# EAGLE board CommDownlinkv1_18_2_12 (EAGLE 5.10)
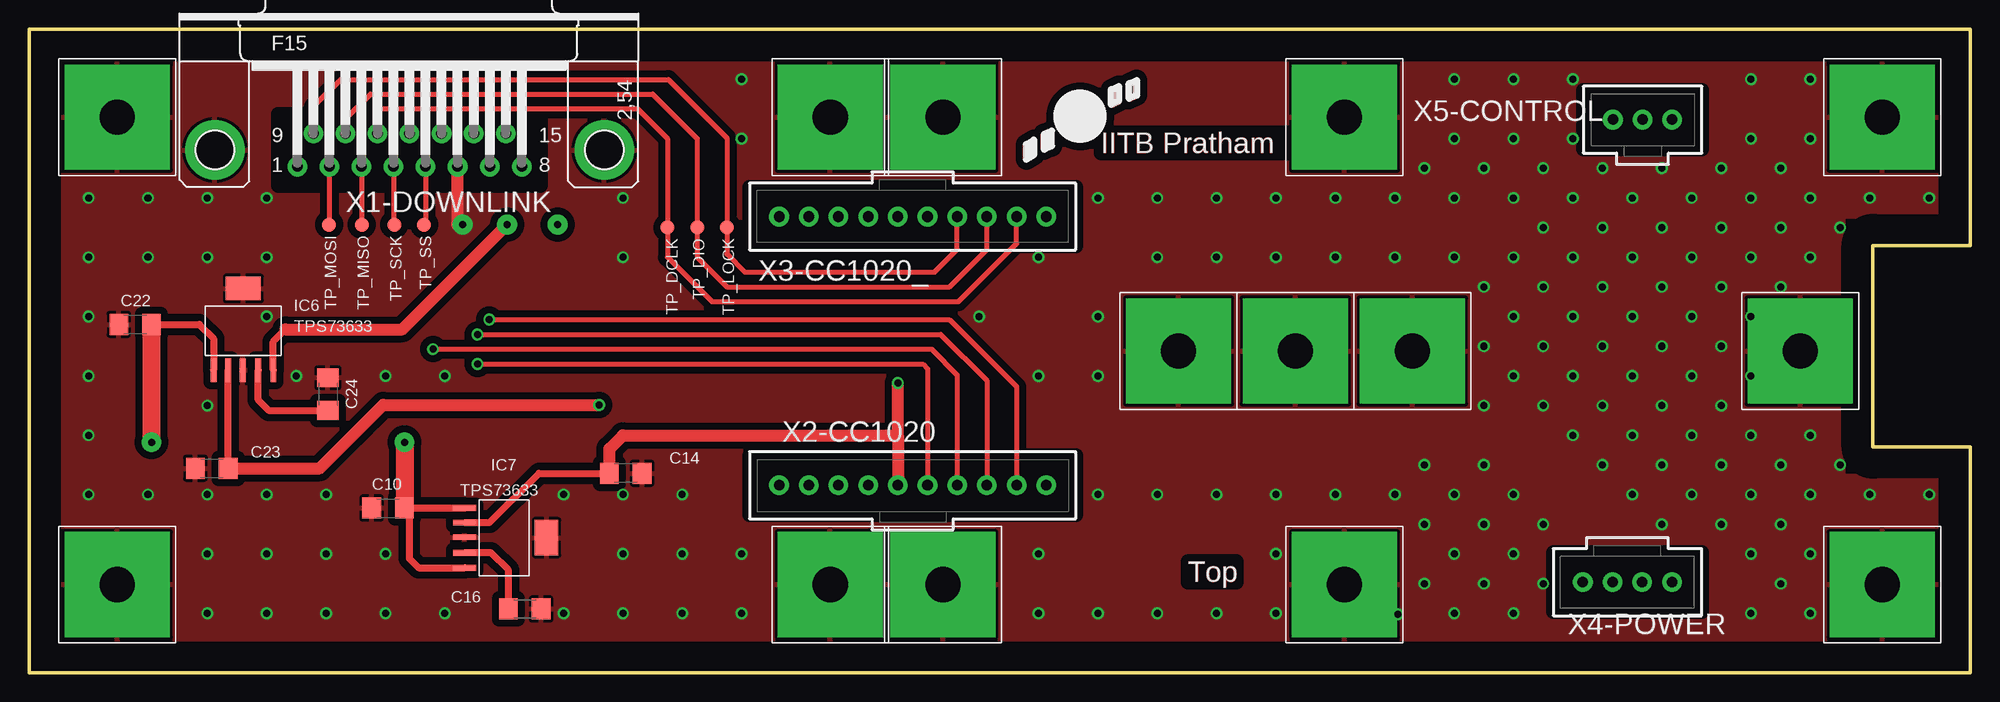
[diagram p0: board, top side]
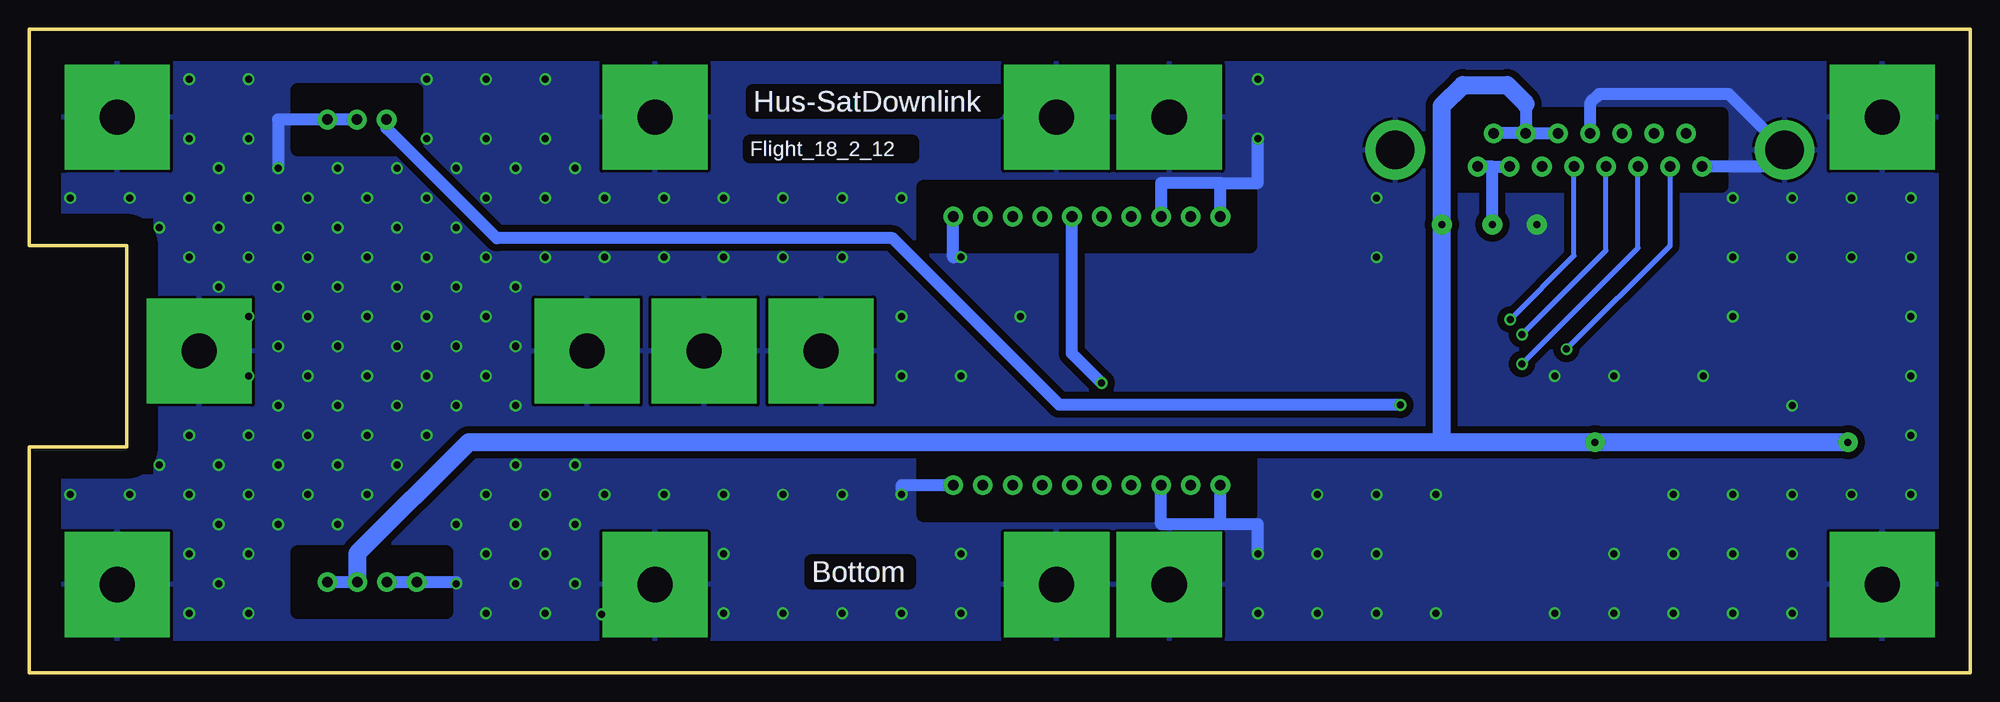
[diagram p1: board, bottom side, seen from below]

Size 166.08 x 55.08 mm. Coordinates in mm from the lower left corner, seen from the top.
Outline: 0,0 166.08,0 166.08,19.32 157.75,19.32 157.75,36.56 166.08,36.56 166.08,55.08 0,55.08 0,0
Copper layers (1*16): Top 0.07mm / dielectric 1.5mm / Bottom 0.07mm
Design rules "satellite": minimum track width 10mil, minimum drill 20mil, track to track 6mil, track to pad 6mil, pad to pad 6mil, via to via 6mil, smd to smd 6mil, copper to edge 100mil, drill to drill 8mil, minimum pad ring 10mil, minimum via ring 8mil, stop-mask expansion 4mil, vias tented up to drill 0mil, thermal gap 10mil
tKeepout: area 54.3,12.5 to 94.7,42.5

## Footprints (pad centres in the part's own frame; a part is rotated, then mirrored left to right if it is on the bottom)
C1206 = smd 1.6 x 1.8: 1 -1.4,0; 2 1.4,0
SOT-223-5 = smd 0.5 x 2: 1 -2.54,-2.75; 2 -1.29,-2.75; 3 -0.04,-2.75; 4 1.29,-2.75; 5 2.58,-2.75 | smd 3 x 2: 6 0,4.25
TP12R = smd 1.2 x 1.2: TP 0,0
MOUNT_10MM = drill 3 pad 9 square: P$1 0,0
F15HP = drill 0.9 pad 1.676 round: 1 -9.601,-1.422; 2 -6.858,-1.422; 3 -4.115,-1.422; 4 -1.372,-1.422; 5 1.372,-1.422; 6 4.115,-1.422; 7 6.858,-1.422; 8 9.601,-1.422; 9 -8.23,1.422; 10 -5.486,1.422; 11 -2.743,1.422; 12 0,1.422; 13 2.743,1.422; 14 5.486,1.422; 15 8.23,1.422 | drill 3.302 pad 5.08 round: G1 16.662,0; G2 -16.662,0
70543-10 = drill 0.9 pad 1.676 round: 1 -11.43,0; 2 -8.89,0; 3 -6.35,0; 4 -3.81,0; 5 -1.27,0; 6 1.27,0; 7 3.81,0; 8 6.35,0; 9 8.89,0; 10 11.43,0
70543-4 = drill 0.9 pad 1.676 round: 1 -3.81,0; 2 -1.27,0; 3 1.27,0; 4 3.81,0
70543-3 = drill 0.9 pad 1.676 round: 1 -2.54,0; 2 0,0; 3 2.54,0

## Placement (x,y rotation side)
C10  0.1uF  [C1206]  30.7,14.1 0 top
C14  2.2uF  [C1206]  51.04,17.07 180 top
C16  0.1uF  [C1206]  42.4,5.46 0 top
C22  0.1uF  [C1206]  9.07,29.81 0 top
C23  0.1uF  [C1206]  15.62,17.49 0 top
C24  0.1uF  [C1206]  25.56,23.85 270 top
IC6  TPS73633  [SOT-223-5]  18.31,28.64 0 top
IC7  TPS73633  [SOT-223-5]  40.01,11.56 270 top
TP_DCLK  TPSQTP12R  [TP12R]  54.61,38.1 0 top
TP_DIO  TPSQTP12R  [TP12R]  57.15,38.1 0 top
TP_LOCK  TPSQTP12R  [TP12R]  59.69,38.1 0 top
TP_MISO  TPSQTP12R  [TP12R]  28.45,38.35 0 top
TP_MOSI  TPSQTP12R  [TP12R]  25.65,38.35 0 top
TP_SCK  TPSQTP12R  [TP12R]  31.24,38.35 0 top
TP_SS  TPSQTP12R  [TP12R]  33.78,38.35 0 top
U$1  MOUNT_SQ  [MOUNT_10MM]  7.54,7.54 0 top
U$2  MOUNT_SQ  [MOUNT_10MM]  7.54,47.54 0 top
U$3  MOUNT_SQ  [MOUNT_10MM]  158.54,47.54 0 top
U$4  MOUNT_SQ  [MOUNT_10MM]  158.54,7.54 0 top
U$5  MOUNT_SQ  [MOUNT_10MM]  118.34,27.54 0 top
U$6  MOUNT_SQ  [MOUNT_10MM]  151.54,27.54 0 top
U$7  MOUNT_SQ  [MOUNT_10MM]  108.34,27.54 0 top
U$8  MOUNT_SQ  [MOUNT_10MM]  112.54,7.54 0 top
U$9  MOUNT_SQ  [MOUNT_10MM]  68.54,7.54 0 top
U$10  MOUNT_SQ  [MOUNT_10MM]  68.54,47.54 0 top
U$11  MOUNT_SQ  [MOUNT_10MM]  78.17,47.54 0 top
U$12  MOUNT_SQ  [MOUNT_10MM]  78.17,7.54 0 top
U$13  MOUNT_SQ  [MOUNT_10MM]  112.54,47.54 0 top
U$14  MOUNT_SQ  [MOUNT_10MM]  98.34,27.54 0 top
X1-DOWNLINK  Downlink  [F15HP]  32.54,44.74 0 top
X2-CC1020  CON-10  [70543-10]  75.59,16.04 0 top
X3-CC1020_  CON-10  [70543-10]  75.59,39.04 180 top
X4-POWER  CON-4  [70543-4]  136.74,7.74 180 top
X5-CONTROL  CON-3  [70543-3]  138.04,47.34 0 top

## Library data of the parts
C10 C14 C16 C22-C24 = rcl
IC6 IC7 U$1-U$14 X1-DOWNLINK X2-CC1020 X3-CC1020_ X4-POWER X5-CONTROL = satellite
TP_DCLK TP_DIO TP_LOCK TP_MISO TP_MOSI TP_SCK TP_SS = testpad

## Nets
+3V3: C14.2 IC7.2 X2-CC1020.5 X3-CC1020_.5
AMP_CONTROL: IC6.5 X1-DOWNLINK.7 X1-DOWNLINK.8
DCLK: TP_DCLK.TP X1-DOWNLINK.11 X3-CC1020_.2
DIO: TP_DIO.TP X1-DOWNLINK.10 X3-CC1020_.3
GND [Power]: C10.1 C14.1 C16.2 C22.1 C23.1 C24.1 IC6.3 IC6.6 IC7.3 IC7.6 U$1.P$1 U$2.P$1 U$3.P$1 U$4.P$1 U$5.P$1 U$6.P$1 U$7.P$1 U$8.P$1 U$9.P$1 U$10.P$1 U$11.P$1 U$12.P$1 U$13.P$1 U$14.P$1 X1-DOWNLINK.1 X1-DOWNLINK.6 X1-DOWNLINK.12 X1-DOWNLINK.G1 X1-DOWNLINK.G2 X2-CC1020.1 X2-CC1020.3 X2-CC1020.10 X3-CC1020_.1 X3-CC1020_.8 X3-CC1020_.10 X4-POWER.3 X4-POWER.4 X5-CONTROL.2 X5-CONTROL.3
LOCK: TP_LOCK.TP X1-DOWNLINK.9 X3-CC1020_.4
MISO: TP_MISO.TP X1-DOWNLINK.3 X2-CC1020.6
MOSI: TP_MOSI.TP X1-DOWNLINK.2 X2-CC1020.7
N$3: C16.1 IC7.4
N$43: C24.2 IC6.4
SCK: TP_SCK.TP X1-DOWNLINK.4 X2-CC1020.8
SS: TP_SS.TP X1-DOWNLINK.5 X2-CC1020.9
VAPC: C23.2 IC6.2 X5-CONTROL.1
VDD [Power]: C10.2 C22.2 IC6.1 IC7.1 IC7.5 X1-DOWNLINK.13 X1-DOWNLINK.14 X1-DOWNLINK.15 X4-POWER.1 X4-POWER.2

## Tracks (layer width: path | path; a pad name or v marks a point on that pad's centre or on a via)
+3V3  (via drill 0.6)
  Top 0.61: IC7.2 39.39,12.85 43.61,17.07 C14.2
  Top 1.016: C14.2 49.64,19.16 50.8,20.32 74.32,20.32 | 74.32,20.32 X2-CC1020.5 | 74.32,20.32 v74.32,24.79
  Bottom 1.016: v74.32,24.79 76.86,27.33 X3-CC1020_.5
AMP_CONTROL  (via drill 0.6 pad 1.68)
  Top 0.406: IC6.5 20.88,25.9
  Top 0.61: 21.92,29.38 20.88,28.34 20.88,25.9
  Top 1.016: 21.92,29.38 31.92,29.38 v40.89,38.35
  Bottom 1.016: 40.89,43.32 X1-DOWNLINK.7 | v40.89,38.35 40.89,43.18 40.89,43.32 | 40.89,43.32 X1-DOWNLINK.8
DCLK
  Top 0.406: X3-CC1020_.2 84.48,36.73 79.5,31.75 58.42,31.75 54.61,35.56 TP_DCLK.TP 54.61,45.72 52.07,48.26 30.01,48.26 29.8,48.05 X1-DOWNLINK.11
DIO
  Top 0.406: X1-DOWNLINK.10 27.05,47.37 29.21,49.53 53.34,49.53 57.15,45.72 TP_DIO.TP 57.15,35.56 59.69,33.02 78.74,33.02 81.94,36.22 X3-CC1020_.3
GND  (via drill 0.6, 0.6 pad 1.68)
  Top 1.016: X1-DOWNLINK.6 36.66,38.35 v37.08,38.35 | X1-DOWNLINK.G1 47.93,46.01
  Bottom 1.016: X4-POWER.3 X4-POWER.4 129.54,7.74 v129.54,7.62 | X5-CONTROL.2 X5-CONTROL.3 144.78,47.34 v144.78,43.18 | X3-CC1020_.10 64.16,41.91 | 64.16,41.91 60.96,41.91 v60.96,45.72 | X3-CC1020_.8 69.24,41.91 64.16,41.91 | X3-CC1020_.1 87.02,35.56 v86.36,35.56 | v91.44,15.24 91.44,16.04 X2-CC1020.10 | 64.16,12.7 X2-CC1020.1 | 64.16,12.7 60.96,12.7 v60.96,10.16 | X2-CC1020.3 69.24,12.7 64.16,12.7 | X1-DOWNLINK.1 17.3,43.32 X1-DOWNLINK.G2 20.67,49.53 31.75,49.53 32.54,48.74 X1-DOWNLINK.12
  other vias: 117.09,4.99 5.08,15.24 5.08,20.32 5.08,25.4 5.08,30.48 5.08,35.56 5.08,40.64 10.16,40.64 10.16,35.56 15.24,35.56 20.32,35.56 20.32,40.64 15.24,40.64 20.32,30.48 15.24,22.86 10.16,15.24 15.24,15.24 15.24,10.16 15.24,5.08 20.32,5.08 25.4,5.08 30.48,5.08 35.56,5.08 30.48,10.16 25.4,10.16 25.4,15.24 20.32,15.24 20.32,10.16 45.72,5.08 50.8,5.08 50.8,10.16 45.72,15.24 50.8,15.24 55.88,15.24 55.88,10.16 60.96,5.08 55.88,5.08 86.36,5.08 91.44,5.08 96.52,5.08 101.6,5.08 106.68,5.08 106.68,10.16 86.36,10.16 96.52,15.24 101.6,15.24 106.68,15.24 111.76,15.24 116.84,15.24 121.92,10.16 119.38,7.62 124.46,7.62 127,10.16 121.92,5.08 127,5.08 147.32,5.08 152.4,5.08 152.4,10.16 147.32,10.16 149.86,7.62 144.78,12.7 139.7,12.7 127,15.24 124.46,12.7 129.54,12.7 119.38,12.7 121.92,15.24 137.16,15.24 142.24,15.24 147.32,15.24 152.4,15.24 149.86,12.7 124.46,17.78 119.38,17.78 127,25.4 132.08,20.32 132.08,25.4 137.16,25.4 142.24,25.4 147.32,25.4 147.32,20.32 142.24,20.32 137.16,20.32 152.4,20.32 149.86,17.78 144.78,17.78 139.7,17.78 134.62,17.78 134.62,22.86 129.54,22.86 124.46,22.86 139.7,22.86 144.78,22.86 127,30.48 132.08,30.48 137.16,30.48 142.24,30.48 147.32,30.48 134.62,27.94 129.54,27.94 124.46,27.94 139.7,27.94 144.78,27.94 132.08,40.64 137.16,40.64 142.24,40.64 147.32,40.64 152.4,40.64 139.7,38.1 134.62,38.1 129.54,38.1 144.78,38.1 149.86,38.1 127,35.56 124.46,33.02 149.86,43.18 152.4,45.72 147.32,45.72 139.7,43.18 134.62,43.18 157.48,40.64 162.56,40.64 162.56,15.24 157.48,15.24 154.94,17.78 154.94,38.1 106.68,40.64 111.76,40.64 116.84,40.64 121.92,40.64 127,40.64 127,45.72 132.08,45.72 121.92,45.72 119.38,43.18 124.46,43.18 129.54,43.18 121.92,35.56 116.84,35.56 121.92,50.8 127,50.8 132.08,50.8 147.32,50.8 152.4,50.8 101.6,40.64 96.52,40.64 91.44,40.64 132.08,35.56 137.16,35.56 142.24,35.56 147.32,35.56 152.4,35.56 139.7,33.02 134.62,33.02 129.54,33.02 144.78,33.02 149.86,33.02 96.52,35.56 101.6,35.56 106.68,35.56 111.76,35.56 91.44,30.48 91.44,25.4 86.36,25.4 81.28,30.48 30.48,25.4 35.56,25.4 22.86,25.4 50.8,35.56 50.8,40.64 60.96,50.8
  pour Top (isolate 0.61): 2.54,2.54 163.54,2.54 163.54,16.78 155.21,16.78 155.21,39.1 163.54,39.1 163.54,52.54 2.54,52.54
  pour Bottom (isolate 0.61): 163.54,2.54 163.54,16.78 155.21,16.78 155.21,39.1 163.54,39.1 163.54,52.54 2.54,52.54 2.54,2.54
LOCK
  Top 0.406: X1-DOWNLINK.9 24.31,48.43 26.64,50.76 54.69,50.76 59.69,45.76 TP_LOCK.TP 59.69,35.81 61.21,34.29 77.47,34.29 79.4,36.22 X3-CC1020_.4
MISO  (via drill 0.6)
  Top 0.406: v38.35,26.42 76.45,26.42 76.86,26.01 X2-CC1020.6 | TP_MISO.TP 28.43,38.35 X1-DOWNLINK.3
  Bottom 0.406: v38.35,26.42 28.43,36.34 X1-DOWNLINK.3
MOSI  (via drill 0.6)
  Top 0.406: v34.54,27.69 77.22,27.69 79.4,25.5 X2-CC1020.7 | TP_MOSI.TP 25.68,38.35 X1-DOWNLINK.2
  Bottom 0.406: v34.54,27.69 25.68,36.55 X1-DOWNLINK.2
N$3
  Top 0.61: IC7.4 39.52,10.27 41,8.78 C16.1
N$4
  Top 0.61: 92.58,49.91 93.22,50.19 93.22,48.92 92.58,48.64 92.58,49.91
N$5
  Top 0.61: 94.11,50.42 94.74,50.7 94.74,49.43 94.11,49.15 94.11,50.42
N$6
  Top 0.61: 86.84,46.08 87.48,46.35 87.48,45.09 86.84,44.81 86.84,46.08
N$7
  Top 0.61: 85.32,45.21 85.95,45.59 85.95,44.32 85.32,43.94 85.32,45.21
N$43
  Top 0.406: IC6.4
  Top 0.61: C24.2 20.48,22.45 19.6,23.32 IC6.4
SCK  (via drill 0.6)
  Top 0.406: X2-CC1020.8 81.94,24.99 77.98,28.96 v38.35,28.96 | TP_SCK.TP 31.17,38.35 X1-DOWNLINK.4
  Bottom 0.406: v38.35,28.96 31.17,36.14 X1-DOWNLINK.4
SS  (via drill 0.6)
  Top 0.406: v39.37,30.23 78.74,30.23 84.48,24.49 X2-CC1020.9 | TP_SS.TP 33.91,38.35 X1-DOWNLINK.5
  Bottom 0.406: v39.37,30.23 33.91,35.68 X1-DOWNLINK.5
VAPC  (via drill 0.6)
  Top 0.406: IC6.2
  Top 0.61: C23.2 IC6.2
  Top 1.016: C23.2 24.86,17.49 30.29,22.91 v48.77,22.91
  Bottom 1.016: X5-CONTROL.1 135.5,46.6 126.08,37.18 92.2,37.18 77.94,22.91 v48.77,22.91
VDD  (via drill 0.6 pad 1.68)
  Top 0.61: C22.2 14.55,29.81 15.77,28.59 IC6.1 | C10.2 32.51,14.1 | 32.51,14.1 IC7.1 | IC7.5 33.31,8.98 32.51,9.78 32.51,14.1
  Top 1.524: C22.2 10.43,29.84 10.41,29.84 10.46,29.79 v10.46,19.72 | C10.2 v32.11,19.72
  Bottom 1.016: X4-POWER.2 X4-POWER.1 | X1-DOWNLINK.14 X1-DOWNLINK.13 | X1-DOWNLINK.14 X1-DOWNLINK.15 | 38.03,48.69 X1-DOWNLINK.14
  Bottom 1.524: 45.21,19.72 v32.11,19.72 v10.46,19.72 | 45.21,19.72 128.48,19.72 138.01,10.2 X4-POWER.2 | 45.21,19.72 v45.21,38.35 45.21,48.51 43.43,50.29 39.62,50.29 38.03,48.69
(copper drawn outside any net)
  shapes: Top circle x1

## Text on the board
Top: IITB Pratham | Top
Bottom: Hus-SatDownlink | Flight_18_2_12 | Bottom
tPlace: IITB Pratham | Top
bPlace: Hus-SatDownlink | Flight_18_2_12 | Bottom
tValues: GND | AMP_CONTROL | VDD